# EAGLE board 504_outin_chirimen (EAGLE 7.4.0)
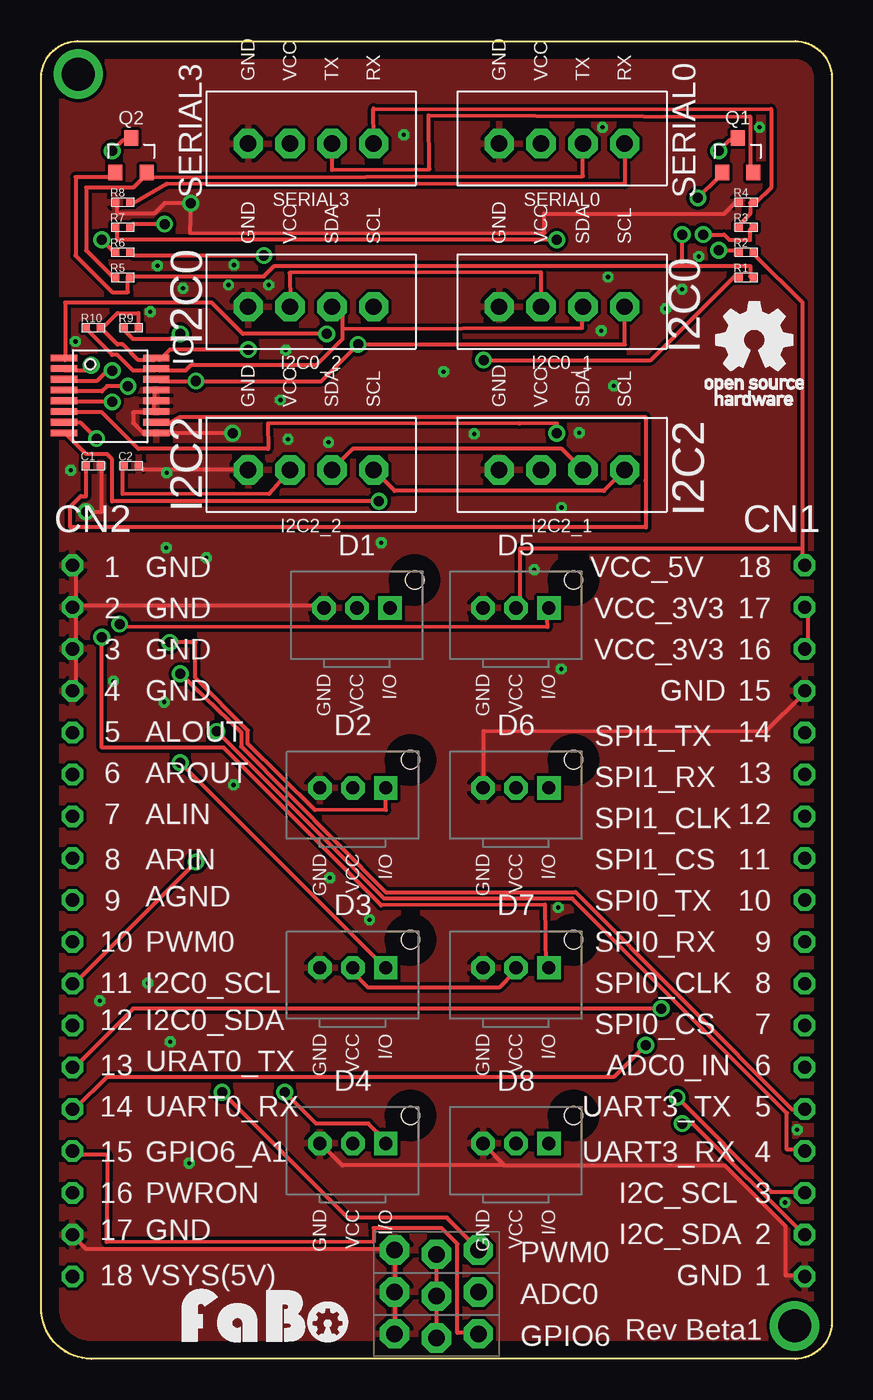
[diagram p0: board, top side]
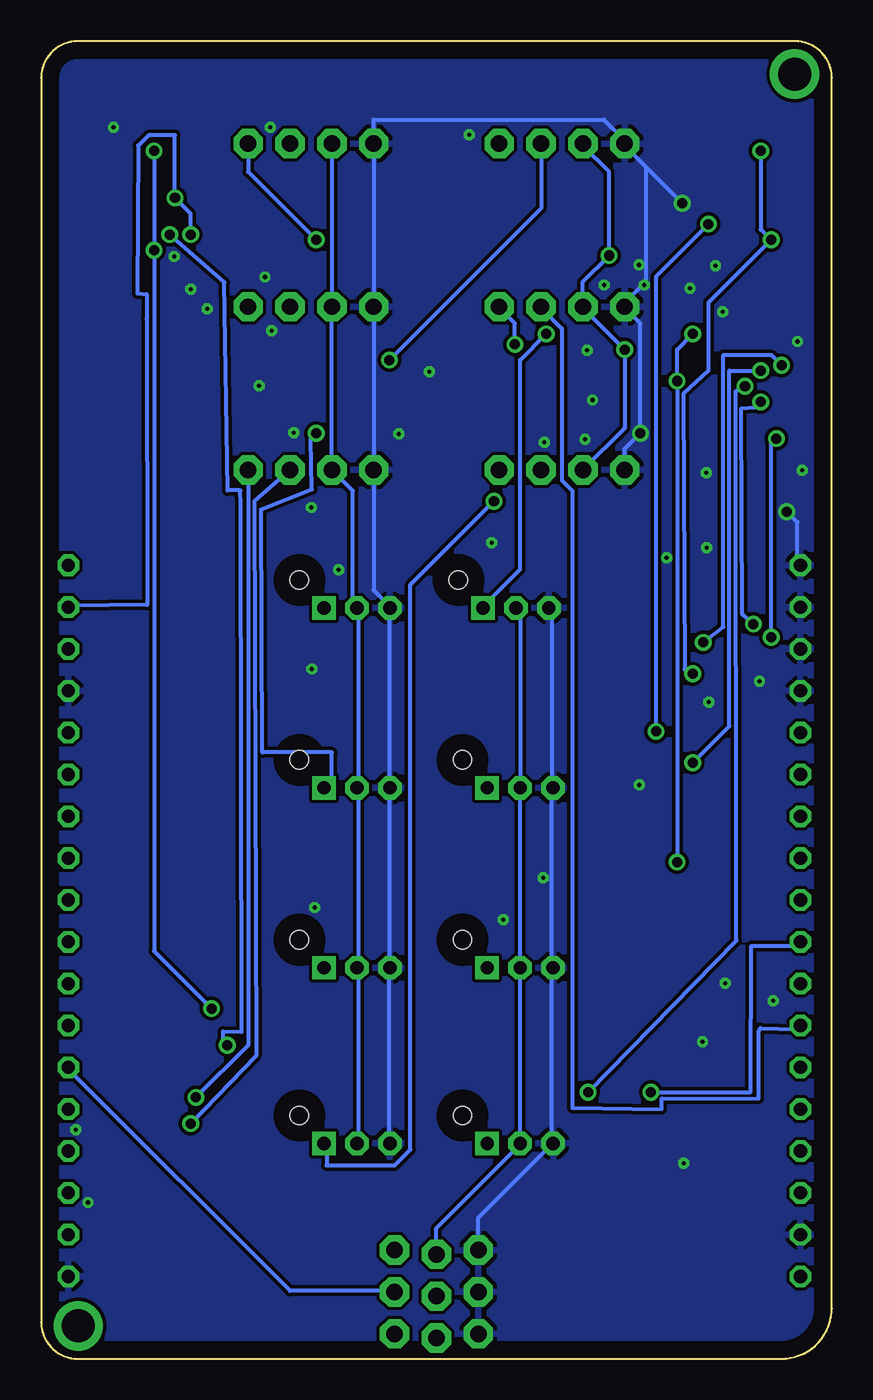
[diagram p1: board, bottom side, seen from below]

Size 48 x 80 mm. Coordinates in mm from the lower left corner, seen from the top.
Copper layers (1*16): Top 0.035mm / dielectric 1.5mm / Bottom 0.035mm
Design rules "default": minimum track width 10mil, minimum drill 24mil, track to track 8mil, track to pad 8mil, pad to pad 8mil, via to via 8mil, smd to smd 8mil, copper to edge 40mil, drill to drill 8mil, minimum pad ring 10mil, minimum via ring 8mil, stop-mask expansion 4mil, vias tented up to drill 0mil, thermal gap 10mil

## Footprints (pad centres in the part's own frame; a part is rotated, then mirrored left to right if it is on the bottom)
FABO_BRICK_3PIN_HEADER = drill 1 pad 1.778 octagon: GND -2.54,0.127; I/O 2.54,0.127; VCC 0,-0.127
0402 = smd 0.5 x 0.5: P$1 -0.46,0; P$2 0.46,0
FABO_BRICK_3PIN_B03B-PASK-1_SILK = drill 0.8 pad 1.422 octagon: GND -2,0; VCC 0,0 | drill 0.8 pad 1.422 square: I/O 2,0 | hole 1.1: 3.5,1.7
FABO_BRICK_I2C_CONNECTOR_I_SILK = drill 1 pad 1.778 octagon: GND -3.81,0; SCL 3.81,0; SDA 1.27,0; VCC -1.27,0
TI-ADS7828 = smd 0.35 x 1.6: 1 -2.48,-2.8; 2 -1.83,-2.8; 3 -1.18,-2.8; 4 -0.53,-2.8; 5 0.12,-2.8; 6 0.77,-2.8; 7 1.42,-2.8; 8 2.07,-2.8; 9 2.07,2.8; 10 1.42,2.8; 11 0.77,2.8; 12 0.12,2.8; 13 -0.53,2.8; 14 -1.18,2.8; 15 -1.83,2.8; 16 -2.48,2.8
SOT23-3 = smd 0.85 x 0.95: 1 -0.95,-1; 2 0.95,-1; 3 0,1.1
FABO_BRICK_SERIAL_CONNECTOR_I_SILK = drill 1 pad 1.778 octagon: GND -3.81,0; RX 3.81,0; TX 1.27,0; VCC -1.27,0
FABO-CHIRIMEN = drill 0.8 octagon: CN1_1 22.35,-35; CN1_2 22.35,-32.46; CN1_3 22.35,-29.92; CN1_4 22.35,-27.38; CN1_5 22.35,-24.84; CN1_6 22.35,-22.3; CN1_7 22.35,-19.76; CN1_8 22.35,-17.22; CN1_9 22.35,-14.68; CN1_10 22.35,-12.14; CN1_11 22.35,-9.6; CN1_12 22.35,-7.06; CN1_13 22.35,-4.52; CN1_14 22.35,-1.98; CN1_15 22.35,0.56; CN1_16 22.35,3.1; CN1_17 22.35,5.64; CN1_18 22.35,8.18; CN2_1 -22.1,8.18; CN2_2 -22.1,5.64; CN2_3 -22.1,3.1; CN2_4 -22.1,0.56; CN2_5 -22.1,-1.98; CN2_6 -22.1,-4.52; CN2_7 -22.1,-7.06; CN2_8 -22.1,-9.6; CN2_9 -22.1,-12.14; CN2_10 -22.1,-14.68; CN2_11 -22.1,-17.22; CN2_12 -22.1,-19.76; CN2_13 -22.1,-22.3; CN2_14 -22.1,-24.84; CN2_15 -22.1,-27.38; CN2_16 -22.1,-29.92; CN2_17 -22.1,-32.46; CN2_18 -22.1,-35 | drill 2: P$1 21.75,-38; P$2 -21.75,38

## Placement (x,y rotation side)
ADC0  [FABO_BRICK_3PIN_HEADER]  24,3.93 0 top
C1  0.1uf  [0402]  3.17,54.22 0 top
C2  1uf  [0402]  5.46,54.22 0 top
D1  [FABO_BRICK_3PIN_B03B-PASK-1_SILK]  19.17,45.59 0 top
D2  [FABO_BRICK_3PIN_B03B-PASK-1_SILK]  18.92,34.67 0 top
D3  [FABO_BRICK_3PIN_B03B-PASK-1_SILK]  18.92,23.74 0 top
D4  [FABO_BRICK_3PIN_B03B-PASK-1_SILK]  18.92,13.08 0 top
D5  [FABO_BRICK_3PIN_B03B-PASK-1_SILK]  28.83,45.59 0 top
D6  [FABO_BRICK_3PIN_B03B-PASK-1_SILK]  28.83,34.67 0 top
D7  [FABO_BRICK_3PIN_B03B-PASK-1_SILK]  28.83,23.74 0 top
D8  [FABO_BRICK_3PIN_B03B-PASK-1_SILK]  28.83,13.08 0 top
GPIO6  [FABO_BRICK_3PIN_HEADER]  24,1.39 0 top
I2C0_1  [FABO_BRICK_I2C_CONNECTOR_I_SILK]  31.62,63.88 0 top
I2C0_2  [FABO_BRICK_I2C_CONNECTOR_I_SILK]  16.38,63.88 0 top
I2C2_1  [FABO_BRICK_I2C_CONNECTOR_I_SILK]  31.62,53.97 0 top
I2C2_2  [FABO_BRICK_I2C_CONNECTOR_I_SILK]  16.38,53.97 0 top
IC  TI-ADS7828  [TI-ADS7828]  4.19,58.29 270 top
PWM0  [FABO_BRICK_3PIN_HEADER]  24,6.47 0 top
Q1  [SOT23-3]  42.29,73.02 0 top
Q2  [SOT23-3]  5.46,73.02 0 top
R1  10k  [0402]  42.8,65.65 0 top
R2  10k  [0402]  42.8,67.18 0 top
R3  3k  [0402]  42.8,68.7 0 top
R4  4.7k  [0402]  42.8,70.23 0 top
R5  10k  [0402]  4.95,65.65 0 top
R6  10k  [0402]  4.95,67.18 0 top
R7  3k  [0402]  4.95,68.7 0 top
R8  4.7k  [0402]  4.95,70.23 0 top
R9  4.7K  [0402]  5.46,62.61 0 top
R10  4.7K  [0402]  3.17,62.61 0 top
SERIAL0  [FABO_BRICK_SERIAL_CONNECTOR_I_SILK]  31.62,73.78 0 top
SERIAL3  [FABO_BRICK_SERIAL_CONNECTOR_I_SILK]  16.38,73.78 0 top
U$2  FABO-CHIRIMEN  [FABO-CHIRIMEN]  24,40 0 top
U$3  [LOGO_OSHW_T_M]  43.3,61.84 0 top
U$10  [LOGO_FABO_MS]  13.59,0.63 0 top

## Library data of the parts
ADC0 D1-D8 GPIO6 I2C0_1 I2C0_2 I2C2_1 I2C2_2 PWM0 SERIAL0 SERIAL3 U$2 = FaBo-Template
C1 C2 = FaBo-Capacitor
IC = FaBo-ADC
Q1 Q2 U$3 U$10 = FaBo-etc
R1-R10 = FaBo-Resistors

## Nets
3V3: Q1.1 Q2.1 R1.P$2 R5.P$2 U$2.CN1_16 U$2.CN1_17
5V: ADC0.VCC C2.P$1 D1.VCC D2.VCC D3.VCC D4.VCC D5.VCC D6.VCC D7.VCC D8.VCC GPIO6.VCC I2C0_1.VCC I2C0_2.VCC I2C2_1.VCC I2C2_2.VCC IC.16 PWM0.VCC R2.P$2 R6.P$2 R9.P$2 R10.P$2 SERIAL0.VCC SERIAL3.VCC U$2.CN1_18
ADC0_IN: ADC0.I/O U$2.CN1_6
CH0: D1.I/O IC.1
CH1: D2.I/O IC.2
CH2: D3.I/O IC.3
CH3: D4.I/O IC.4
CH4: D5.I/O IC.5
CH5: D6.I/O IC.6
CH6: D7.I/O IC.7
CH7: D8.I/O IC.8
GND: ADC0.GND C1.P$2 C2.P$2 D1.GND D2.GND D3.GND D4.GND D5.GND D6.GND D7.GND D8.GND GPIO6.GND I2C0_1.GND I2C0_2.GND I2C2_1.GND I2C2_2.GND IC.9 IC.11 IC.12 IC.13 PWM0.GND R4.P$1 R8.P$1 SERIAL0.GND SERIAL3.GND U$2.CN1_1 U$2.CN1_15 U$2.CN2_1 U$2.CN2_2 U$2.CN2_3 U$2.CN2_4 U$2.CN2_17
GPIO6_A1: GPIO6.I/O U$2.CN2_15
N$3: C1.P$1 IC.10
PWM0: PWM0.I/O U$2.CN2_10
RX0: R3.P$1 R4.P$2 SERIAL3.RX
RX3: R7.P$1 R8.P$2 SERIAL0.RX
SCL0: I2C0_1.SCL I2C0_2.SCL IC.14 R9.P$1 U$2.CN2_11
SCL2: I2C2_1.SCL I2C2_2.SCL U$2.CN1_3
SDA0: I2C0_1.SDA I2C0_2.SDA IC.15 R10.P$1 U$2.CN2_12
SDA2: I2C2_1.SDA I2C2_2.SDA U$2.CN1_2
TX0: Q1.2 R1.P$1 SERIAL3.TX
TX3: Q2.2 R5.P$1 SERIAL0.TX
UART0_RX: R3.P$2 U$2.CN2_14
UART0_TX: Q1.3 R2.P$1 U$2.CN2_13
UART3_RX: R7.P$2 U$2.CN1_4
UART3_TX: Q2.3 R6.P$1 U$2.CN1_5

## Tracks (layer width: path | path; a pad name or v marks a point on that pad's centre or on a via)
3V3  (via drill 0.61)
  Top 0.254: U$2.CN1_16 46.54,43.17 46.54,45.4 U$2.CN1_17 | Q2.1 4.32,71.75 2.09,71.75 2.09,66.99 4.32,64.77 5.27,64.77 5.27,65.72 R5.P$2 5.59,65.72 13.52,65.72 14.16,66.35 38.92,66.35 | 38.92,66.35 43.05,66.35 43.05,65.72 R1.P$2 | v39.88,70.48 41.14,71.75 Q1.1 | 38.92,66.35 v38.92,68.26
  Bottom 0.254: v38.92,68.26 38.92,69.53 v39.88,70.48 39.88,74.29 41.46,74.29 42.1,73.66 42.11,73.66 42.16,64.69 41.6,64.64 41.6,63.16 41.56,45.78 46.22,45.71 U$2.CN1_17
5V  (via drill 0.61)
  Top 0.254: GPIO6.VCC ADC0.VCC PWM0.VCC | I2C2_2.VCC 13.84,52.52 4.95,52.5 4.95,54.29 C2.P$1 | 3.68,62.54 4.63,61.59 4.95,61.59 5.9,60.64 6.86,60.64 IC.16 7.17,60.64 7.81,61.27 v12.57,61.27 | 3.68,62.54 4.63,63.5 5.9,63.5 5.9,62.54 R9.P$2 | 3.68,62.54 R10.P$2 | v13.52,66.99 5.59,66.99 R6.P$2 | 46.22,49.21 46.22,48.26 U$2.CN1_18 | 46.22,49.21 46.22,64.13 43.37,66.99 R2.P$2 | 46.22,49.21 29.08,49.21 29.08,45.71 D5.VCC | I2C0_1.VCC 30.35,65.96 15.09,65.93 15.11,64.13 I2C0_2.VCC | D3.VCC 18.92,23.49 19.87,22.54 27.81,22.54 28.76,23.49 D7.VCC
  Bottom 0.254: D1.VCC 18.92,45.4 D2.VCC D3.VCC D4.VCC 18.92,13.01 24,7.93 PWM0.VCC | SERIAL3.VCC 15.11,73.66 13.52,72.07 v13.52,66.99 15.11,65.4 I2C0_2.VCC 15.11,63.81 v12.57,61.27 12.57,56.51 I2C2_2.VCC | SERIAL0.VCC I2C0_1.VCC I2C2_1.VCC 29.08,52.7 29.08,45.71 D5.VCC 28.76,45.4 28.76,34.92 D6.VCC 28.76,34.6 28.76,23.81 D7.VCC 28.76,23.49 28.76,13.33 D8.VCC
ADC0_IN
  Bottom 0.254: U$2.CN1_6 46.22,17.46 32.89,4.12 26.54,4.12 ADC0.I/O
CH0  (via drill 0.61)
  Top 0.254: v17.33,62.23 12.25,62.23 10.35,64.13 1.46,64.13 1.46,60.64 IC.1
  Bottom 0.254: v17.33,62.23 18.92,60.64 18.92,47.94 21.14,45.71 D1.I/O
CH1  (via drill 0.61)
  Top 0.254: v3.05,60.32 2.73,60 1.46,60 IC.2 | v7.81,43.49 9.37,43.49 9.37,41.35 12.55,38.15 12.55,37.32 12.56,37.32 16.62,33.33 20.93,33.32 D2.I/O
  Bottom 0.254: v3.05,60.32 3.68,60.95 6.58,60.95 6.58,44.45 v7.81,43.49
CH2  (via drill 0.61)
  Top 0.254: v4.32,60 4,60 3.36,59.37 1.46,59.37 IC.3 | v8.44,36.19 20.82,23.81 D3.I/O
  Bottom 0.254: v4.32,60 6.22,60 6.22,38.41 v8.44,36.19
CH3  (via drill 0.61)
  Top 0.254: v5.27,59.05 4,59.05 3.68,58.73 1.46,58.73 IC.4 | v14.79,16.19 16.7,14.28 19.87,14.28 20.82,13.33 D4.I/O
  Bottom 0.254: v5.27,59.05 5.84,58.73 5.79,25.39 v14.79,16.19
CH4  (via drill 0.61)
  Top 0.254: v4.32,58.1 1.46,58.1 IC.5 | v4.76,44.61 4.95,44.45 30.73,44.42 30.67,45.4 D5.I/O
  Bottom 0.254: v4.32,58.1 4.63,57.78 5.48,57.7 5.43,45.22 v4.76,44.61
CH5  (via drill 0.61)
  Top 0.254: v31.3,56.19 31.32,56.78 29.03,56.79 13.76,56.78 13.78,55.24 5.9,55.24 3.68,57.46 1.46,57.46 IC.6
  Bottom 0.254: v31.3,56.19 31.62,55.88 31.57,52.79 34.64,51.57 34.57,36.83 30.35,36.83 30.35,35.24 30.67,34.92 D6.I/O
CH6  (via drill 0.61)
  Top 0.254: v3.36,55.88 2.41,56.83 1.46,56.83 IC.7 | v3.68,43.81 3.68,37.1 11.07,37.1 20.65,27.53 30.6,27.58 30.67,23.81 D7.I/O
  Bottom 0.254: v3.36,55.88 3.68,55.56 v3.68,43.81
CH7  (via drill 0.61)
  Top 0.254: v20.51,52.06 4.32,52.06 4.32,54.6 4,54.92 2.73,54.92 1.46,56.19 IC.8
  Bottom 0.254: v20.51,52.06 25.59,46.98 25.59,12.7 26.54,11.74 30.67,11.74 30.67,13.01 D8.I/O
GND  (via drill 0.25, 0.61)
  Top 0.254: U$2.CN2_4 2.09,40.63 2.09,42.86 U$2.CN2_3 2.09,43.17 2.09,45.4 U$2.CN2_2 2.09,45.71 | v2.73,51.43 3.68,51.43 3.68,54.29 C1.P$2 | 2.09,45.71 2.09,47.94 U$2.CN2_1 | GPIO6.GND ADC0.GND PWM0.GND 21.46,6.66 2.73,6.66 2.09,7.3 U$2.CN2_17 | 2.09,45.71 17.02,45.71 D1.GND | 6.86,58.1 6.86,58.73 IC.13 | 6.86,57.46 5.59,57.46 5.59,56.83 6.22,56.19 6.86,56.19 IC.9 7.17,56.19 v11.62,56.19 | 6.86,57.46 6.86,58.1 | 6.86,58.1 IC.12 | 6.86,57.46 IC.11 | I2C2_2.GND 6.22,53.97 5.9,54.29 C2.P$2 | R8.P$1 4.63,70.16 4.63,69.53 6.86,69.53 7.49,70.16 v9.08,70.16 9.03,68.36 30.55,68.35 30.55,69.53 41.46,69.53 42.1,70.16 R4.P$1 | 28.13,11.74 41.51,11.74 45.18,8.07 45.18,5.07 46.22,5.07 U$2.CN1_1 | 28.13,11.74 26.86,13.01 D8.GND | U$2.CN1_15 46.22,40.32 44,38.09 26.86,38.12 26.86,34.92 D6.GND | 28.13,11.74 18.29,11.74 17.02,13.01 D4.GND
  Bottom 0.254: v2.73,51.43 2.09,50.8 2.09,48.26 U$2.CN2_1 | D1.GND 17.02,45.4 17.02,34.92 D2.GND 17.02,34.6 17.02,23.81 D3.GND 17.02,23.49 17.02,13.33 D4.GND 17.02,13.01 21.46,8.57 PWM0.GND | I2C2_2.GND 12.57,55.24 v11.62,56.19 11.62,62.86 12.57,63.81 I2C0_2.GND 12.57,64.13 11.3,65.4 11.3,72.39 | 11.3,72.39 12.57,73.66 SERIAL3.GND 12.57,73.97 13.84,75.24 27.81,75.24 SERIAL0.GND I2C0_1.GND I2C2_1.GND 27.81,46.67 26.86,45.71 D5.GND 26.86,45.4 26.86,34.92 D6.GND 26.86,34.6 26.86,23.81 D7.GND 26.86,23.49 26.86,13.33 D8.GND | 11.3,72.39 v9.08,70.16
  other vias: 20.65,49.55 29.94,47.9 31.59,51.68 26.29,56.15 34.41,65.68 38.91,64.94 11.71,66.42 7.06,66.37 1.8,53.94 4.39,41.14 7.46,39.87 11.68,34.84 8.99,11.88 45.16,9.49 45.89,13.91 31.39,27.4 19.94,26.66 17.52,29.2 14.98,55.82 17.45,55.65 14.53,58.21 7.62,53.79 7.59,49.25 10.03,48.64 24.43,59.94 14.86,61.23 11.38,65.2 8.61,64.99 6.63,63.57 37.92,63.75 39.93,66.92 22.02,74.32 34.08,74.77 43.61,74.77 2.08,61.77 31.57,41.88 13.81,65.2 7.85,19.25 6.47,22.8 3.55,21.74 34.77,59.08 32.66,56.23 34.01,62.43
  pour Bottom: -0.13,-0.64 48.13,-0.64 48.13,80.64 -0.13,80.64
  pour Top: -0.13,-0.64 48.13,-0.64 48.13,80.64 -0.13,80.64
GPIO6_A1
  Top 0.254: U$2.CN2_15 2.09,12.38 4.04,12.38 4.04,11.96 3.97,7.09 20.19,7.08 20.19,7.93 24.32,7.93 25.27,6.98 25.27,1.58 26.54,1.58 GPIO6.I/O
N$3
  Top 0.254: C1.P$1 2.73,54.29 2.73,52.38 2.41,52.38 1.78,51.75 1.78,50.48 36.71,50.48 36.7,53.34 36.7,57.18 8.44,57.18 7.81,56.83 7.17,56.83 IC.10
PWM0  (via drill 0.61)
  Top 0.254: v10.98,16.19 18.6,8.57 24.64,8.57 26.54,6.66 PWM0.I/O
  Bottom 0.254: v10.98,16.19 4.93,16.19 4.87,25.06 2.09,25.08 U$2.CN2_10
RX0
  Top 0.254: R3.P$1 42.42,68.89 43.05,69.53 43.05,70.16 R4.P$2 43.37,70.16 44.32,71.11 44.32,75.88 20.17,75.9 20.19,73.97 SERIAL3.RX
RX3  (via drill 0.61)
  Top 0.254: v31.3,67.94 4.63,67.94 4.63,68.58 R7.P$1 | SERIAL0.RX 35.43,71.32 7.63,71.34 5.59,70.16 R8.P$2
  Bottom 0.254: v31.3,67.94 35.43,72.07 SERIAL0.RX
SCL0  (via drill 0.61)
  Top 0.254: v8.44,62.23 8.13,61.91 5.59,61.91 4.95,62.54 R9.P$1 | IC.14 7.17,59.37 v9.4,59.37 17.02,59.37 v19.24,61.59 35.44,61.59 35.43,63.81 I2C0_1.SCL | v9.4,30.16 2.09,22.86 U$2.CN2_11
  Bottom 0.254: v8.44,62.23 9.4,61.27 v9.4,59.37 v9.4,30.16 | v19.24,61.59 19.24,62.86 20.19,63.81 I2C0_2.SCL
SCL2  (via drill 0.61)
  Top 0.254: v38.61,15.87 44.32,10.13 46.22,10.15 U$2.CN1_3 | I2C2_2.SCL 21.46,52.7 34.16,52.7 I2C2_1.SCL
  Bottom 0.254: v38.61,15.87 35.43,19.04 I2C2_1.SCL
SDA0
  Top 0.254: R10.P$1 2.73,62.54 4.32,60.95 4.63,60.95 5.59,60 6.86,60 IC.15 7.17,60 8.76,60 9.08,60.32 16.7,60.32 18.29,61.91 18.29,62.54 | 18.29,62.54 18.29,63.81 17.65,63.81 I2C0_2.SDA | 18.29,62.54 32.84,62.59 32.89,63.81 I2C0_1.SDA
  Bottom 0.254: U$2.CN2_12 2.09,20 4.34,20.07 4.44,19.88 4.44,15.79 10.31,15.82 10.34,15.16 15.75,15.23 15.75,52.7 16.38,53.34 16.38,62.54 17.65,63.81 I2C0_2.SDA
SDA2  (via drill 0.61)
  Top 0.254: v38.92,14.28 39.56,14.28 46.22,7.62 U$2.CN1_2 | I2C2_2.SDA 18.92,55.24 31.62,55.24 I2C2_1.SDA
  Bottom 0.254: v38.92,14.28 34.95,18.41 35.05,52.06 I2C2_1.SDA
TX0  (via drill 0.61)
  Top 0.254: v26.86,60.64 37.02,60.64 42.1,65.72 R1.P$1 | SERIAL3.TX 17.65,72.18 23.57,72.23 23.53,75.5 43.05,75.42 43.05,72.07 Q1.2
  Bottom 0.254: v26.86,60.64 17.65,69.84 SERIAL3.TX
TX3
  Top 0.254: R5.P$1 4.32,65.72 2.73,67.3 2.73,71.11 5.59,71.11 6.22,71.75 Q2.2 6.54,71.75 32.89,71.8 SERIAL0.TX
UART0_RX  (via drill 0.61)
  Top 0.254: v40.19,68.26 41.46,68.26 41.78,67.94 43.05,67.94 43.05,68.58 R3.P$2 | v36.7,19.04 34.8,17.14 4,17.14 2.09,15.23 U$2.CN2_14
  Bottom 0.254: v40.19,68.26 36.88,65.35 36.67,52.73 35.91,52.73 35.89,51.81 35.84,19.86 36.95,19.88 36.95,19.04 v36.7,19.04
UART0_TX  (via drill 0.61)
  Top 0.254: v41.14,67.3 42.1,67.3 R2.P$1 | v41.14,73.34 41.78,73.97 42.1,73.97 Q1.3 | v37.65,21.27 5.59,21.27 2.09,17.77 U$2.CN2_13
  Bottom 0.254: v41.14,73.34 v41.14,67.3 41.14,24.76 v37.65,21.27
UART3_RX  (via drill 0.61)
  Top 0.254: v7.49,68.89 5.59,68.89 R7.P$2 | v10.67,38.09 20.82,27.93 32.25,27.93 45.27,14.92 45.27,12.7 46.22,12.7 U$2.CN1_4
  Bottom 0.254: v7.49,68.89 10.67,65.72 v10.67,38.09
UART3_TX  (via drill 0.61)
  Top 0.254: v3.68,67.94 4.32,67.3 R6.P$1 | v4.32,73.34 4.95,73.97 5.27,73.97 Q2.3 | v8.44,41.59 12.14,38.03 12.14,37.18 20.91,28.33 32.45,28.33 45.61,15.13 U$2.CN1_5
  Bottom 0.254: v4.32,73.34 4.32,68.58 v3.68,67.94 7.49,64.13 7.49,60 9.01,58.58 8.94,41.85 v8.44,41.59

## Text on the board
tPlace: SERIAL3 | SERIAL0 | I2C0 | I2C0 | I2C2 | I2C2 | Rev Beta1